# Altium PCB motorServoDriver.PcbDoc
Units mm, origin at the board's own origin, x right, y up, seen from the top; angles counter-clockwise.
Board outline 125.35 x 63.75 mm, 2 copper layers (Top Layer, Bottom Layer); 79 components, 83 nets, 298 pads, 401 vias.
Unrouted connection lines stored in the file: 8.
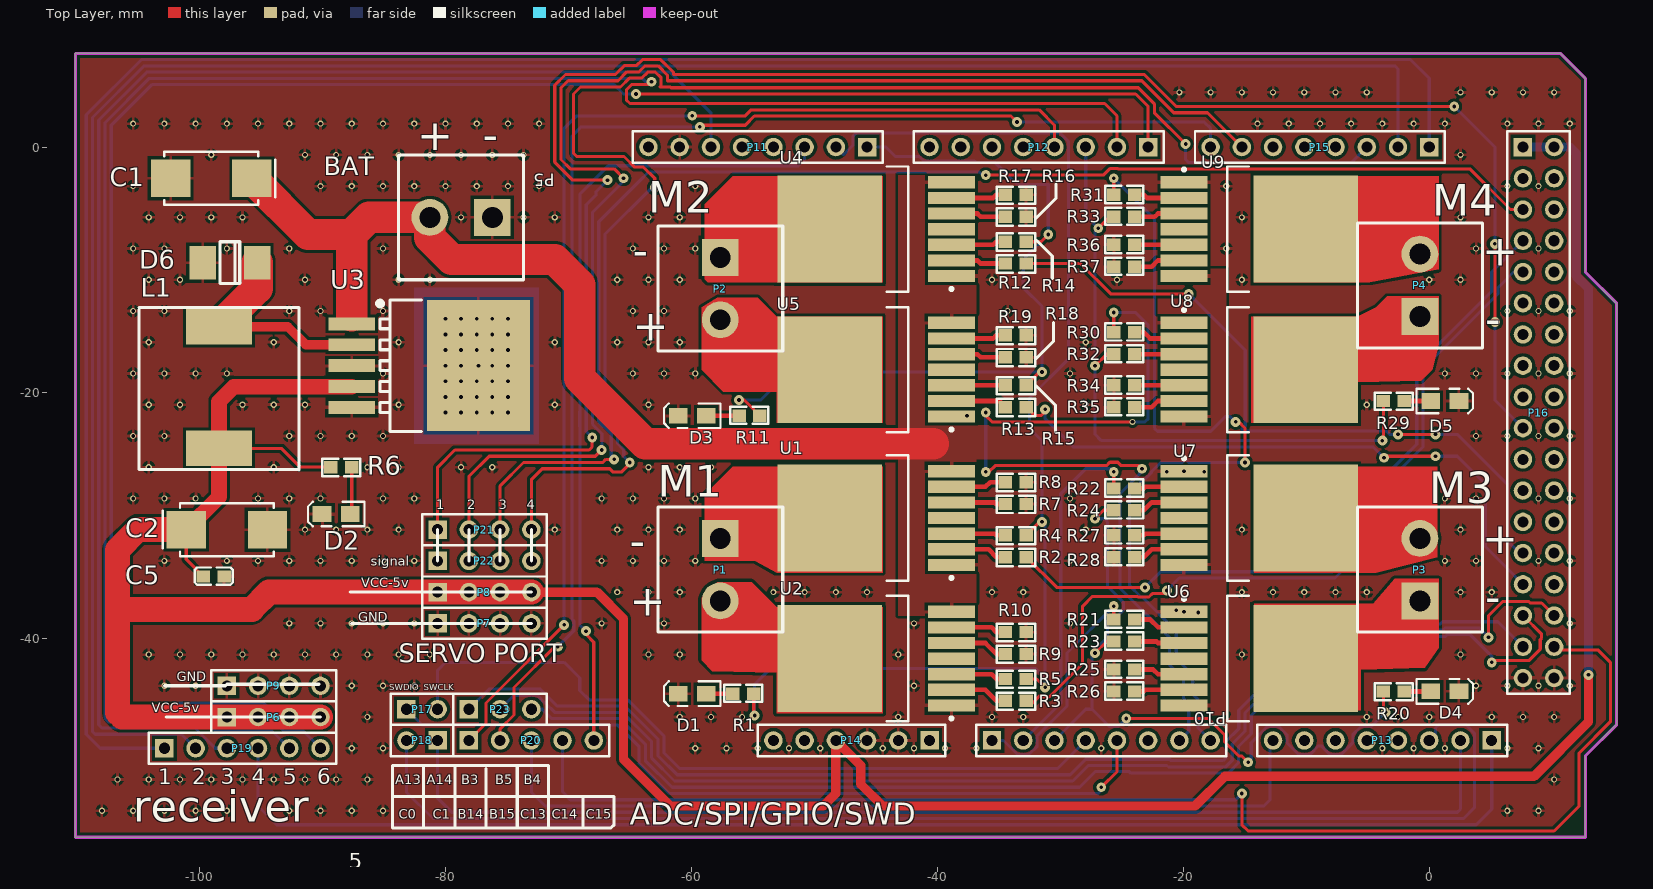
[diagram p0: Top Layer view]
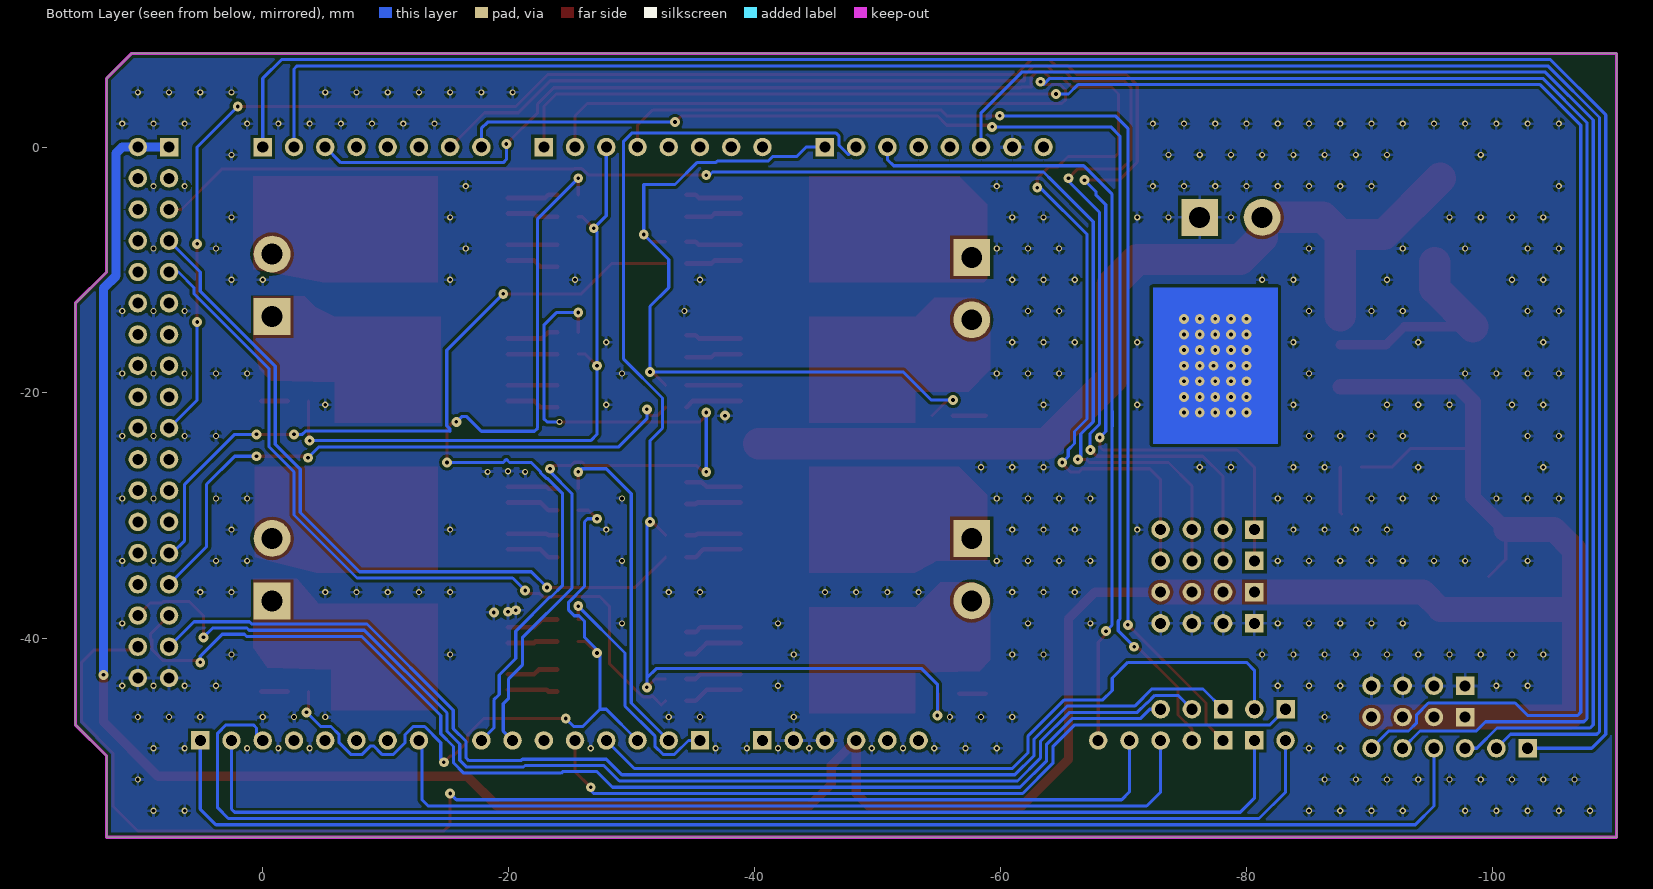
[diagram p1: Bottom Layer view, seen from below]

## Layer stack, top to bottom
Top Solder: solder mask 0.0102, Solder Resist, Dk 3.5
Top Layer: signal copper 0.0356
Dielectric 1: dielectric 0.32, FR-4, Dk 4.8
Bottom Layer: signal copper 0.0356
Bottom Solder: solder mask 0.0102, Solder Resist, Dk 3.5

## Board outline
-110.109,-56.134 -110.109,7.62 10.668,7.62 12.7,5.588 12.7,-10.16 15.24,-12.7 15.24,-46.99 12.7,-49.53 12.7,-56.134

## Design rules (kind name [scope] priority, off if disabled: settings)
Clearance [All] p1: gap=0.254
ComponentClearance [All] p1 off: gap=0.254 collisioncheckmode=3 verticalgap=0.254 showdistances=FALSE
HoleSize [All] p1: absolutevalues=TRUE maxlimit=2.54 minlimit=0.3 maxpercent=80.000 minpercent=20.000
MinimumSolderMaskSliver [All] p1: minsoldermaskwidth=0.001
PolygonConnect [All] p1: connectstyle=Relief reliefconductorwidth=0.254 reliefentries=4 polygonreliefangle="90 Angle" airgapwidth=0.254
RoutingVias [All] p1: holewidth=0.3 width=0.8 viastyle="Through Hole" minholewidth=0.3 minwidth=0.8 maxholewidth=2.54 maxwidth=3
SilkToSilkClearance [All] p1 off: silktosilkclearance=0.254
SilkToSolderMaskClearance [IsPad] p1 off: minsilkscreentomaskgap=0.254 clearancetoexposedcopper=TRUE
SolderMaskExpansion [All] p1: expansion=0.102
Width [All] p1: maxlimit=2.54 minlimit=0.178 preferedwidth=0.254
25 further rules are at their usual default settings.

## Components (designator, comment, footprint, x,y, rotation, side; value= is the part's Value field where it differs from the comment)
C1 "Cap" CAP-7343 -99.06,-2.54 r180 top
C2 "Cap" CAP-7343 -97.79,-31.115 r0 top
C5 "cap smd" CAP-0603 -99.695,-34.925 r0 top
D1 "LED2" D2012[0805] -59.944,-44.45 r180 top
D2 "LED2" D2012[0805] -88.9,-29.845 r180 top
D3 "LED2" D2012[0805] -59.944,-21.844 r180 top
D4 "LED2" D2012[0805] 1.27,-44.272 r0 top
D5 "LED2" D2012[0805] 1.27,-20.65 r0 top
D6 "SS34" LC-SMB(DO-214AA)_S3 -97.536,-9.398 r180 top
L1 "Inductor" Inductor1207 -98.425,-14.605 r270 top
P1 "2_Pins_Port" WJ2EDGV-5.08-2P -57.658,-31.826 r270 top
P2 "2_Pins_Port" WJ2EDGV-5.08-2P -57.658,-8.966 r270 top
P3 "2_Pins_Port" WJ2EDGV-5.08-2P -0.762,-36.906 r90 top
P4 "2_Pins_Port" WJ2EDGV-5.08-2P -0.762,-13.792 r90 top
P5 "2_Pins_Port" WJ2EDGV-5.08-2P -76.2,-5.715 r180 top
P6 "VCC-5" HDR1X4 -97.79,-46.355 r0 top
P7 "GND" HDR1X4 -80.645,-38.735 r0 top
P8 "VCC" HDR1X4 -80.645,-36.195 r0 top
P9 "GND" HDR1X4 -97.79,-43.815 r0 top
P10 "Header 8" HDR1X8 -35.56,-48.26 r0 top
P11 "Header 8" HDR1X8 -45.72,0 r180 top
P12 "Header 8" HDR1X8 -22.86,0 r180 top
P13 "Header 8" HDR1X8 5.08,-48.26 r180 top
P14 "5vGND" HDR1x6 -40.64,-48.26 r180 top
P15 "Header 8" HDR1X8 0,0 r180 top
P16 "Header 18X2" HDR2X18 7.62,0 r270 top
P17 "SWD" HDR1X2 -83.185,-45.72 r0 top
P18 "ADC" HDR1X2 -80.645,-48.26 r180 top
P19 "REC" HDR1X6 -102.87,-48.895 r0 top
P20 "Header 5" HDR1X5 -78.105,-48.26 r0 top
P21 "Sig" HDR1X4 -80.645,-31.115 r0 top
P22 "Sig" HDR1X4 -80.645,-33.655 r0 top
P23 "SPI3" HDR1X3 -78.105,-45.72 r0 top
R1 "Res1" RES-0603 -56.642,-44.45 r0 top
R2 "10K" RES-0603 -32.766,-33.35 r180 top
R3 "10K" RES-0603 -32.766,-45.034 r180 top
R4 "10K" RES-0603 -32.766,-31.572 r180 top
R5 "10K" RES-0603 -32.766,-43.256 r180 top
R6 "RES1" RES-0603 -87.63,-26.035 r180 top
R7 "10K" RES-0603 -32.766,-29.032 r180 top
R8 "10K" RES-0603 -32.766,-27.254 r180 top
R9 "10K" RES-0603 -32.766,-41.224 r180 top
R10 "10K" RES-0603 -32.766,-39.446 r180 top
R11 "Res1" RES-0603 -56.134,-21.844 r0 top
R12 "10K" RES-0603 -32.766,-9.474 r180 top
R13 "10K" RES-0603 -32.766,-21.158 r180 top
R14 "10K" RES-0603 -32.766,-7.696 r180 top
R15 "10K" RES-0603 -32.766,-19.38 r180 top
R16 "10K" RES-0603 -32.766,-5.664 r180 top
R17 "10K" RES-0603 -32.766,-3.886 r180 top
R18 "10K" RES-0603 -32.766,-17.094 r180 top
R19 "10K" RES-0603 -32.766,-15.316 r180 top
R20 "Res1" RES-0603 -2.032,-44.272 r180 top
R21 "10K" RES-0603 -25.654,-38.43 r0 top
R22 "10K" RES-0603 -25.654,-27.762 r0 top
R23 "10K" RES-0603 -25.654,-40.208 r0 top
R24 "10K" RES-0603 -25.654,-29.54 r0 top
R25 "10K" RES-0603 -25.654,-42.494 r0 top
R26 "10K" RES-0603 -25.654,-44.272 r0 top
R27 "10K" RES-0603 -25.654,-31.572 r0 top
R28 "10K" RES-0603 -25.654,-33.35 r0 top
R29 "Res1" RES-0603 -2.032,-20.65 r180 top
R30 "10K" RES-0603 -25.654,-15.062 r0 top
R31 "10K" RES-0603 -25.654,-3.886 r0 top
R32 "10K" RES-0603 -25.654,-16.84 r0 top
R33 "10K" RES-0603 -25.654,-5.664 r0 top
R34 "10K" RES-0603 -25.654,-19.38 r0 top
R35 "10K" RES-0603 -25.654,-21.158 r0 top
R36 "10K" RES-0603 -25.654,-7.95 r0 top
R37 "10K" RES-0603 -25.654,-9.728 r0 top
U1 "BTN7970" BTN7970 -44.958,-30.175 r180 top
U2 "BTN7970" BTN7970 -44.958,-41.605 r180 top
U3 "LM2596" LC-TO-263-5 -87.63,-17.78 r180 top
U4 "BTN7970" BTN7970 -44.958,-6.68 r180 top
U5 "BTN7970" BTN7970 -44.958,-18.11 r180 top
U6 "BTN7970" BTN7970 -13.843,-41.605 r0 top
U7 "BTN7970" BTN7970 -13.843,-30.175 r0 top
U8 "BTN7970" BTN7970 -13.843,-18.11 r0 top
U9 "BTN7970" BTN7970 -13.843,-6.68 r0 top

## Footprints (in the part's own frame and the unit in brackets; to place one, negate y for a bottom-side part, rotate by r counter-clockwise, add the part's x,y. Pads: shape width x height; smd on the part's side, far side on the other; paste and mask are expansions set on the pad)
BTN7970 [mm] "D2-PAK, 8-Pads, Body 7.82x8.46mm (max), IPC Medium Density"
  rect 3.85x1 smd paste-0.1: 1(-6.1,3.81) 2(-6.1,2.54) 3(-6.1,1.27) 4(-6.1,0) 5(-6.1,-1.27) 6(-6.1,-2.54) 7(-6.1,-3.81)
  rect 8.5x8.7 smd paste-1: 4(3.8,0)
  silkscreen extent -6.23,-5.1 -0.85,5.1, body extent -2.6,-5.1 6.85,5.1, height 4.4
CAP-0603 [mm]
  rect 1.1x1 smd: 1(0,0) 2(1.7,0)
  silkscreen extent -0.71,-0.67 2.39,0.73
CAP-7343 [mm] "钽电容"
  rect 3.2x3.05 smd: 1(-3.302,0) 2(3.302,0)
  silkscreen extent -5.21,-2.16 3.81,2.16, body extent -3.68,-1.91 3.68,1.91, height 2.95
D2012[0805] [mil]
  rect 60x50 smd: 1(-45,0) 2(45,0)
  silkscreen extent -91,-39 91,39, body extent -39,-24 39,24, height 47
HDR1X2 [mm] "Connector; Header; 2 Position"
  rect 1.5x1.5 hole 0.9: 1(0,0)
  round 1.5 hole 0.9: 2(2.54,0)
  silkscreen extent -1.27,-1.27 3.81,1.27
HDR1X3 [mm] "Connector; Header; 3 Position"
  rect 1.5x1.5 hole 0.9: 1(0,0)
  round 1.5 hole 0.9: 2(2.54,0) 3(5.08,0)
  silkscreen extent -1.27,-1.27 6.35,1.27
HDR1X4 [mm] "Connector; Header; 4 Position"
  rect 1.5x1.5 hole 0.9: 1(0,0)
  round 1.5 hole 0.9: 2(2.54,0) 3(5.08,0) 4(7.62,0)
  silkscreen extent -1.27,-1.27 8.89,1.27
HDR1X5 [mm] "Connector; Header; 5 Position"
  rect 1.5x1.5 hole 0.9: 1(0,0)
  round 1.5 hole 0.9: 2(2.54,0) 3(5.08,0) 4(7.62,0) 5(10.16,0)
  silkscreen extent -1.27,-1.27 11.43,1.27
HDR1x6 [mm] "Connector; Header; 6 Position"
  rect 1.5x1.5 hole 0.9: 1(0,0)
  round 1.5 hole 0.9: 2(2.54,0) 3(5.08,0) 4(7.62,0) 5(10.16,0) 6(12.7,0)
  silkscreen extent -1.27,-1.27 13.97,1.27
HDR1X6 [mm] "Connector; Header; 6 Position"
  rect 1.5x1.5 hole 0.9: 1(0,0)
  round 1.5 hole 0.9: 2(2.54,0) 3(5.08,0) 4(7.62,0) 5(10.16,0) 6(12.7,0)
  silkscreen extent -1.27,-1.27 13.97,1.27
HDR1X8 [mm] "Connector; Header; 8 Position"
  rect 1.5x1.5 hole 0.9: 1(0,0)
  round 1.5 hole 0.9: 2(2.54,0) 3(5.08,0) 4(7.62,0) 5(10.16,0) 6(12.7,0) 7(15.24,0) 8(17.78,0)
  silkscreen extent -1.27,-1.27 19.05,1.27
HDR2X18 [mm] "Connector; Header; 18x2 Position"
  rect 1.5x1.5 hole 0.9: 1(0,0)
  round 1.5 hole 0.9: 2(0,2.54) 3(2.54,0) 4(2.54,2.54) 5(5.08,0) 6(5.08,2.54) 7(7.62,0) 8(7.62,2.54) 9(10.16,0) 10(10.16,2.54) 11(12.7,0) 12(12.7,2.54) 13(15.24,0) 14(15.24,2.54) 15(17.78,0) 16(17.78,2.54) 17(20.32,0) 18(20.32,2.54) 19(22.86,0) 20(22.86,2.54) 21(25.4,0) 22(25.4,2.54) 23(27.94,0) 24(27.94,2.54) 25(30.48,0) 26(30.48,2.54) 27(33.02,0) 28(33.02,2.54) 29(35.56,0) 30(35.56,2.54) 31(38.1,0) 32(38.1,2.54) 33(40.64,0) 34(40.64,2.54) 35(43.18,0) 36(43.18,2.54)
  silkscreen extent -1.27,-1.27 44.45,3.81
Inductor1207 [mm] "Inductor1207"
  rect 2.9x5.4 smd: 1(0,0) 2(9.9,0)
  silkscreen extent -1.55,-6.5 11.66,6.5
LC-SMB(DO-214AA)_S3 [mm]
  rect 2.159x2.743 smd: 1(2.21,0) 2(-2.21,0)
  silkscreen extent -0.8,-1.7 0.8,1.7
LC-TO-263-5 [mm]
  rect 8.4x10.65 smd: 0(-10.3,0)
  rect 3.8x1.05 smd: 1(0,-3.4) 2(0,-1.7) 3(0,0) 4(0,1.7) 5(0,3.4)
  silkscreen extent -5.65,-5.35 -2.1,5.35
RES-0603 [mm] "1/10W"
  rect 1.1x1 smd: 1(0,0) 2(1.7,0)
  silkscreen extent -0.71,-0.67 2.39,0.73
WJ2EDGV-5.08-2P [mm]
  rect 3x3 hole 1.7: 1(0,0)
  round 3 hole 1.7: 2(5.08,0)
  silkscreen extent -2.54,-5.08 7.62,5.08

## Part data
C1 C2: library part "Cap Pol S", "贴片极性电容"
C5: library part CAP, "贴片无极性电容"
D1 D2 D3 D4 D5: "Typical RED, GREEN, YELLOW, AMBER GaAs LED"
D6: library part "Diode 1N5400", "3 Amp General Purpose Rectifier"
P6 P7 P8 P9 P21 P22: library part "Header 4", "Header, 4-Pin"
P10 P11 P12 P13 P15: "Header, 8-Pin"
P14 P19: library part "Header 6", "Header, 6-Pin"
P16: "Header, 18-Pin, Dual row"
P17 P18: library part "Header 2", "Header, 2-Pin"
P20: "Header, 5-Pin"
P23: library part "Header 3", "Header, 3-Pin"
R1 R11 R20 R29: "Resistor"
R2 R3 R4 R5 R7 R8 R9 R10 R12 R13 R14 R15 R16 R17 R18 R19 R21 R22 R23 R24 R25 R26 R27 R28 R30 R31 R32 R33 R34 R35 R36 R37: library part res1, "Resistor"

## Via types
v1: diameter 0.5, hole 0.3, Top Layer to Bottom Layer, 306 vias
v2: diameter 0.8, hole 0.3, Top Layer to Bottom Layer, 95 vias

## Nets (pads, with @x,y where several pads share a name; then routed paths per layer and width w, separated by ;. In a path a pad name is that pad's centre, name@x,y a point inside that pad or via, vN(x,y) a via of type N, cw(c..) or ccw(c..) an arc to the next point about the centre after c; other vN are vias at no path point)
ADC-OTHER: P13.1 P19.4 | length 111.8
  Bottom Layer w0.254: P19.4 -95.25,-53.594 -93.726,-55.118 3.81,-55.118 5.08,-53.848 P13.1
ADC_CH10: P13.3 P18.2 | length 103.1
  Bottom Layer w0.254: P18.2 -83.185,-52.451 -81.026,-54.61 2.794,-54.61 3.671,-53.733 3.671,-47.677 2.984,-46.99 0.762,-46.99 0.508,-47.244 0.508,-47.752 P13.3
ADC_CH11: P13.2 P18.1 | length 94.1
  Bottom Layer w0.254: P18.1 -80.645,-52.959 -79.502,-54.102 2.286,-54.102 2.54,-53.848 P13.2
AXIS-A-EN: P16.5 P21.3 P22.3 | length 114.6
  Top Layer w0.254: P22.3 P21.3 -75.565,-27.559 -73.66,-25.654 -67.221,-25.654 -66.967,-25.4 v2(-66.294,-25.4) ; v2(-36.068,-2.286) -26.505,-2.286 -25.977,-1.759 -25.331,-1.759 -25.311,-1.778 3.302,-1.778 6.604,-5.08 P16.5
  Bottom Layer w0.254: v2(-66.294,-25.4) -66.529,-25.165 -66.529,-23.342 -67.545,-22.326 -67.545,-6.077 -64.262,-2.794 -63.5,-2.032 -36.576,-2.032 -36.322,-2.286 v2(-36.068,-2.286)
AXIS-A-FR: P16.9 R3.1 | length 64
  Top Layer w0.254: R3.1 -32.423,-45.377 -31.667,-44.621 -31.565,-44.723 -30.919,-44.723 -28.194,-41.999 -28.194,-37.338 -27.413,-36.557 -23.711,-36.557 -23.672,-36.595 -22.791,-36.595 -22.517,-36.322 -21.59,-36.322 v2(-21.336,-36.068)
  Bottom Layer w0.254: v2(-21.336,-36.068) -20.32,-35.052 -7.664,-35.052 -2.54,-29.928 -2.54,-26.416 -0.508,-24.384 -0.508,-18.034 5.588,-11.938 5.588,-11.43 6.858,-10.16 P16.9
AXIS-A-STEP: P16.7 R2.1 | length 59.8
  Top Layer w0.254: R2.1 -30.302,-35.814 v2(-23.114,-35.814)
  Bottom Layer w0.254: v2(-23.114,-35.814) -21.844,-34.544 -7.874,-34.544 -3.048,-29.718 -3.048,-26.206 -1.016,-24.174 -1.016,-17.824 5.08,-11.728 5.08,-10.16 P16.7
AXIS-X-EN: P16.19 P21.1 P22.1 | length 159
  Top Layer w0.254: P22.1 P21.1 -80.645,-26.035 -79.248,-24.638 -68.326,-24.638 -68.091,-24.403 -68.091,-23.641 v2(-68.072,-23.622) ; v2@-66.929,-2.794 v2(-66.827,-2.692) -69.655,-2.692 -71.12,-1.226 -71.12,5.036 -70.253,5.904 -66.19,5.904 -65.471,6.623 -64.479,6.623 -63.99,7.112 -62.502,7.112 -61.449,6.059 -61.449,5.904 -23.176,5.904 -20.574,3.302 v2(2.032,3.302) ; v2(5.334,-14.224) v2(5.334,-7.874)
  Bottom Layer w0.254: v2(-68.072,-23.622) -68.561,-23.133 -68.561,-4.684 -67.753,-3.875 -67.753,-3.617 v2(-66.827,-2.692) ; v2(2.032,3.302) 5.334,0 v2(5.334,-7.874) ; v2(5.334,-14.224) 5.334,-20.574 P16.19
AXIS-X-FR: P10.2 R22.1 | length 27.9
  Top Layer w0.254: R22.1 v2(-25.654,-26.416)
  Bottom Layer w0.254: P10.2 -29.972,-45.212 -29.972,-28.194 -27.94,-26.162 -25.908,-26.162 v2(-25.654,-26.416)
AXIS-X-STEP: P10.1 R21.1 | length 19.7
  Top Layer w0.254: R21.1 -25.832,-38.43 -25.654,-38.252 v2(-25.654,-37.338)
  Bottom Layer w0.254: P10.1 -34.619,-48.26 -33.488,-49.391 -32.552,-49.391 -31.889,-48.728 -31.889,-47.891 -29.464,-45.466 -29.464,-41.148 v2(-25.654,-37.338)
AXIS-Y-EN: P10.3 R20.2 R23.1 R24.1 | length 60.2
  Top Layer w0.254: v2(-27.178,-41.148) -26.238,-40.208 R23.1 ; v2(-27.178,-30.226) -26.492,-29.54 R24.1 ; v2(-24.638,-46.482) -17.959,-46.482 -16.649,-47.792 -16.649,-48.375 -15.494,-49.53 -15.24,-49.53 v2(-14.732,-50.038) ; R20.2 -3.732,-45.896 -3.81,-45.974 v2(-3.556,-45.974)
  Bottom Layer w0.254: P10.3 -27.94,-45.72 -27.432,-45.72 ; v2(-27.178,-30.226) -26.416,-30.226 -26.162,-30.48 -26.162,-35.725 -24.873,-37.015 -24.873,-37.661 -25.331,-38.119 -25.717,-38.119 -26.162,-38.564 -26.162,-39.878 -27.178,-40.894 v2(-27.178,-41.148) -27.432,-41.402 -27.432,-45.72 ; v2(-24.638,-46.482) -25.285,-47.129 -26.023,-47.129 -27.432,-45.72 ; v2(-14.732,-50.038) -14.478,-49.784 -14.478,-48.439 -13.168,-47.129 -12.232,-47.129 -11.569,-47.792 -11.569,-48.45 -10.628,-49.391 -9.692,-49.391 -9.005,-48.705 -8.775,-48.705 -8.088,-49.391 -7.152,-49.391 -6.211,-48.45 -6.211,-47.792 -5.548,-47.129 -4.711,-47.129 v2(-3.556,-45.974)
AXIS-Y-FR: P10.8 R31.1 | length 68.5
  Top Layer w0.254: R31.1 v2(-25.654,-2.54) ; v2(-15.748,-22.352) -16.002,-22.352 -15.748,-22.606 -15.494,-22.352 -14.986,-22.86 v2(-14.986,-25.654)
  Bottom Layer w0.254: v2(-25.654,-2.54) -22.352,-5.842 -22.352,-22.86 -22.098,-23.114 -17.78,-23.114 -16.586,-21.92 -16.18,-21.92 v2(-15.748,-22.352) ; P10.8 -18.796,-47.244 -18.796,-44.958 -19.237,-44.517 -19.237,-42.932 -20.574,-41.594 -20.574,-39.37 -23.349,-36.595 -23.437,-36.595 -24.384,-35.649 -24.384,-28.194 -23.133,-26.943 -23.045,-26.943 -22.587,-26.485 -22.587,-26.397 -21.844,-25.654 -20.066,-25.654 -19.812,-25.4 -19.558,-25.654 v2(-14.986,-25.654)
AXIS-Y-STEP: P10.7 R30.1 | length 69.7
  Top Layer w0.254: v2(-36.068,-26.416) -35.814,-26.416 -35.306,-25.908 -26.251,-25.908 -25.977,-25.635 -25.331,-25.635 -25.057,-25.908 -23.622,-25.908 v2(-23.368,-26.162) ; v2(-36.068,-21.59) -36.068,-21.844 -35.56,-22.352 v1(-24.13,-22.352) ; R30.1 v2(-25.654,-13.462)
  Bottom Layer w0.254: v2(-36.068,-26.416) v2(-36.068,-21.59) ; v2(-25.654,-13.462) -23.876,-13.462 -22.86,-14.478 -22.86,-22.098 -23.114,-22.352 v1(-24.13,-22.352) ; v2(-23.368,-26.162) -23.368,-26.416 -25.146,-28.194 -25.146,-35.876 -21.113,-39.909 -21.113,-42.133 -19.999,-43.247 -19.999,-44.833 -19.558,-45.274 -19.558,-47.498 P10.7
AXIS-Z-EN: P13.8 P20.3 | length 69.9
  Bottom Layer w0.254: P20.3 -73.025,-52.451 -71.882,-53.594 -13.462,-53.594 -12.954,-53.086 -12.954,-48.514 P13.8
AXIS-Z-FR: P16.29 R13.1 | length 50.4
  Top Layer w0.254: R13.1 -32.08,-21.844 -31.572,-21.844 -31.242,-21.514 v2(-31.242,-21.336) ; v2(-3.683,-25.273) -3.556,-25.146 v2(0.508,-25.146)
  Bottom Layer w0.254: v2(-31.242,-21.336) -31.242,-22.098 -28.956,-24.384 -4.572,-24.384 v2(-3.683,-25.273) ; v2(0.508,-25.146) 2.286,-25.146 4.572,-27.432 4.572,-32.512 P16.29
AXIS-Z-STEP: P16.27 R12.1 | length 57.1
  Top Layer w0.254: R12.1 -28.372,-9.474 -25.908,-11.938 v2(-19.558,-11.938) ; v2(-2.54,-23.368) v2(0.508,-23.368)
  Bottom Layer w0.254: v2(-19.558,-11.938) -14.967,-16.529 -14.967,-22.675 -15.24,-22.949 -15.24,-23.114 -15.221,-23.095 -3.487,-23.095 -3.213,-23.368 v2(-2.54,-23.368) ; v2(0.508,-23.368) 2.286,-23.368 6.35,-27.432 6.35,-32.004 7.366,-33.02 P16.27
EX-FAN-5: P11.3 P20.5 | length 65.4
  Top Layer w0.254: v2(-68.58,-39.37) -68.58,-39.624 -67.945,-40.259 P20.5
  Bottom Layer w0.254: v2(-68.58,-39.37) -69.069,-38.881 -69.069,-22.754 -69.088,-22.735 -69.088,-22.165 -69.088,-21.534 -69.088,-21.472 -69.069,-21.453 -69.069,-3.81 -69.05,-3.81 -66.764,-1.524 -51.308,-1.524 -50.8,-1.016 P11.3
EX-PWM-5: P11.2 R1.2 R4.1 R5.1 | length 99.2
  Top Layer w0.254: R1.2 -54.942,-46.15 v2(-54.864,-46.228) ; R5.1 -31.928,-43.256 v2(-31.242,-43.942) ; R4.1 -31.674,-30.48 v2(-31.496,-30.48)
  Bottom Layer w0.254: v2(-54.864,-46.228) -54.864,-43.688 -53.594,-42.418 -32.004,-42.418 -31.242,-43.18 ; P11.2 -47.64,-0.62 -46.851,0.169 -46.851,0.908 -46.628,1.131 -30.012,1.131 -29.349,0.468 -29.349,-17.246 -32.512,-20.409 -32.512,-22.86 -31.496,-23.876 v2(-31.496,-30.48) -31.242,-30.734 -31.242,-43.18 ; v2(-31.242,-43.942) -31.242,-43.18
GND: C1.2 C2.2 C5.2 D1.2 D2.2 D3.2 D4.2 D5.2 D6.1 P5.1 P7.1 P7.2 P7.3 P7.4 P9.1 P9.2 P9.3 P9.4 P11.7 P14.2 P14.3 P16.35 P16.36 R7.1 R8.1 R9.1 R10.1 R16.1 R17.1 R18.1 R19.1 R25.1 R26.1 R27.1 R28.1 R34.1 R35.1 R36.1 R37.1 U1.1 U2.1 U3.0 U3.3 U3.5 U4.1 U5.1 U6.1 U7.1 U8.1 U9.1
  other v1: -107.95,-53.975 -105.41,-53.975 -102.87,-53.975 -100.33,-53.975 -97.79,-53.975 -92.71,-53.975 -90.17,-53.975 -87.63,-53.975 -85.09,-53.975 6.35,-53.975 8.89,-53.975 -106.68,-51.435 -104.14,-51.435 -101.6,-51.435 -99.06,-51.435 -96.52,-51.435 -93.98,-51.435 -91.44,-51.435 -88.9,-51.435 -86.36,-51.435 10.16,-51.435 -87.63,-48.895 -85.09,-48.895 -59.69,-48.895 -57.15,-48.895 -54.61,-48.895 -52.07,-48.895 -49.53,-48.895 -44.45,-48.895 -41.91,-48.895 -39.37,-48.895 -36.83,-48.895 -26.67,-48.895 -3.81,-48.895 -1.27,-48.895 1.27,-48.895 6.35,-48.895 8.89,-48.895 -86.36,-46.355 -60.96,-46.355 -58.42,-46.355 -55.88,-46.355 -43.18,-46.355 -35.56,-46.355 -33.02,-46.355 -5.08,-46.355 -2.54,-46.355 0,-46.355 5.08,-46.355 7.62,-46.355 10.16,-46.355 -102.87,-43.815 -100.33,-43.815 -87.63,-43.815 -85.09,-43.815 -82.55,-43.815 -41.91,-43.815 3.81,-43.815 6.35,-43.815 8.89,-43.815 11.43,-43.815 -104.14,-41.275 -101.6,-41.275 -99.06,-41.275 -96.52,-41.275 -93.98,-41.275 -91.44,-41.275 -88.9,-41.275 -86.36,-41.275 -83.82,-41.275 -81.28,-41.275 -63.5,-41.275 -60.96,-41.275 -43.18,-41.275 -15.24,-41.275 2.54,-41.275 -92.71,-38.735 -90.17,-38.735 -87.63,-38.735 -85.09,-38.735 -82.55,-38.735 -67.31,-38.735 -62.23,-38.735 -41.91,-38.735 -29.21,-38.735 11.43,-38.735 -66.04,-36.195 -63.5,-36.195 -60.96,-36.195 -53.34,-36.195 -50.8,-36.195 -48.26,-36.195 -45.72,-36.195 -35.56,-36.195 -33.02,-36.195 -15.24,-36.195 -12.7,-36.195 -10.16,-36.195 -7.62,-36.195 -5.08,-36.195 2.54,-36.195 5.08,-36.195 -102.87,-33.655 -97.79,-33.655 -95.25,-33.655 -92.71,-33.655 -90.17,-33.655 -87.63,-33.655 -85.09,-33.655 -82.55,-33.655 -67.31,-33.655 -64.77,-33.655 -62.23,-33.655 -59.69,-33.655 -29.21,-33.655 1.27,-33.655 3.81,-33.655 8.89,-33.655 11.43,-33.655 -91.44,-31.115 -88.9,-31.115 -86.36,-31.115 -83.82,-31.115 -71.12,-31.115 -66.04,-31.115 -63.5,-31.115 -60.96,-31.115 -27.94,-31.115 -15.24,-31.115 2.54,-31.115 -105.41,-28.575 -102.87,-28.575 -100.33,-28.575 -95.25,-28.575 -92.71,-28.575 -90.17,-28.575 -85.09,-28.575 -82.55,-28.575 -67.31,-28.575 -64.77,-28.575 -62.23,-28.575 -59.69,-28.575 -29.21,-28.575 1.27,-28.575 3.81,-28.575 8.89,-28.575 11.43,-28.575 -21.336,-26.416 -18.288,-26.416 -19.943,-26.365 -104.14,-26.035 -93.98,-26.035 -86.36,-26.035 -83.82,-26.035 -78.74,-26.035 -76.2,-26.035 -63.5,-26.035 -60.96,-26.035 -58.42,-26.035 -105.41,-23.495 -102.87,-23.495 -92.71,-23.495 -90.17,-23.495 -87.63,-23.495 -85.09,-23.495 3.81,-23.495 6.35,-23.495 8.89,-23.495 11.43,-23.495 -104.14,-20.955 -101.6,-20.955 -96.52,-20.955 -93.98,-20.955 -91.44,-20.955 -83.82,-20.955 -71.12,-20.955 -63.5,-20.955 -27.94,-20.955 -5.08,-20.955 -105.41,-18.415 -102.87,-18.415 -100.33,-18.415 -97.79,-18.415 -85.09,-18.415 -64.77,-18.415 -62.23,-18.415 -59.69,-18.415 -29.21,-18.415 1.27,-18.415 3.81,-18.415 6.35,-18.415 8.89,-18.415 11.43,-18.415 -104.14,-15.875 -93.98,-15.875 -83.82,-15.875 -71.12,-15.875 -66.04,-15.875 -63.5,-15.875 -60.96,-15.875 -27.94,-15.875 -105.41,-13.335 -102.87,-13.335 -92.71,-13.335 -90.17,-13.335 -85.09,-13.335 -64.77,-13.335 -62.23,-13.335 -34.29,-13.335 6.35,-13.335 8.89,-13.335 11.43,-13.335 -104.14,-10.795 -101.6,-10.795 -91.44,-10.795 -83.82,-10.795 -81.28,-10.795 -66.04,-10.795 -63.5,-10.795 -60.96,-10.795 -35.56,-10.795 -25.4,-10.795 -15.24,-10.795 0,-10.795 2.54,-10.795 -105.41,-8.255 -102.87,-8.255 -97.79,-8.255 -92.71,-8.255 -85.09,-8.255 -64.77,-8.255 -62.23,-8.255 -59.69,-8.255 -16.51,-8.255 3.81,-8.255 8.89,-8.255 -104.14,-5.715 -101.6,-5.715 -99.06,-5.715 -96.52,-5.715 -78.74,-5.715 -73.66,-5.715 -71.12,-5.715 -63.5,-5.715 -60.96,-5.715 -15.24,-5.715 2.54,-5.715 -105.41,-3.175 -90.17,-3.175 -87.63,-3.175 -85.09,-3.175 -82.55,-3.175 -80.01,-3.175 -77.47,-3.175 -74.93,-3.175 -72.39,-3.175 -59.69,-3.175 -16.51,-3.175 6.35,-3.175 8.89,-3.175 -99.06,-0.635 -91.44,-0.635 -88.9,-0.635 -86.36,-0.635 -83.82,-0.635 -81.28,-0.635 -78.74,-0.635 -76.2,-0.635 -73.66,-0.635 2.54,-0.635 -105.41,1.905 -102.87,1.905 -100.33,1.905 -97.79,1.905 -95.25,1.905 -92.71,1.905 -90.17,1.905 -87.63,1.905 -85.09,1.905 -82.55,1.905 -80.01,1.905 -77.47,1.905 -74.93,1.905 -72.39,1.905 -13.97,1.905 -11.43,1.905 -8.89,1.905 -6.35,1.905 -3.81,1.905 -1.27,1.905 1.27,1.905 6.35,1.905 8.89,1.905 11.43,1.905 -20.32,4.445 -17.78,4.445 -15.24,4.445 -12.7,4.445 -10.16,4.445 -7.62,4.445 -5.08,4.445 2.54,4.445 5.08,4.445 7.62,4.445 10.16,4.445
  other v2: -18.796,-37.846 -19.943,-37.795 -20.586,-37.668 -37.592,-21.844 -80.01,-21.59 -78.74,-21.59 -77.47,-21.59 -76.2,-21.59 -74.93,-21.59 -80.01,-20.32 -78.74,-20.32 -77.47,-20.32 -76.2,-20.32 -74.93,-20.32 -80.01,-19.05 -78.74,-19.05 -77.47,-19.05 -76.2,-19.05 -74.93,-19.05 -80.01,-17.78 -78.74,-17.78 -77.33,-17.78 -76.2,-17.78 -74.93,-17.78 -80.01,-16.51 -78.74,-16.51 -77.47,-16.51 -76.2,-16.51 -74.93,-16.51 -80.01,-15.24 -78.74,-15.24 -77.47,-15.24 -76.2,-15.24 -74.93,-15.24 -80.01,-13.97 -78.74,-13.97 -77.47,-13.97 -76.2,-13.97 -74.93,-13.97
HB-PWM-5: P11.1 R11.2 R14.1 R15.1 | length 64.3
  Top Layer w0.254: v2(-56.134,-20.574) -55.704,-20.574 R11.2 ; R15.1 -31.674,-18.288 v2(-31.496,-18.288) ; R14.1 -31.572,-7.696 v2(-30.988,-7.112)
  Bottom Layer w0.254: v2(-56.134,-20.574) -54.356,-20.574 -52.07,-18.288 v2(-31.496,-18.288) -31.496,-12.954 -33.02,-11.43 -33.02,-9.144 v2(-30.988,-7.112) -30.988,-3.048 -33.528,-3.048 -35.306,-1.27 -36.83,-1.27 -36.969,-1.131 -41.108,-1.131 -41.477,-0.762 -43.434,-0.762 -44.196,0 P11.1
I2C1_SCL: P15.1 P19.1 | length 174.5
  Bottom Layer w0.254: P19.1 -108.077,-48.895 -109.22,-47.752 -109.22,2.62 -104.728,7.112 -1.524,7.112 0,5.588 P15.1
I2C1_SDA: P15.2 P19.2 | length 173.3
  Bottom Layer w0.254: P19.2 -101.473,-47.752 -108.502,-47.752 -108.712,-47.542 -108.712,2.409 -104.517,6.604 -2.794,6.604 -2.54,6.35 P15.2
LED: P11.6 P19.3 | length 116
  Bottom Layer w0.254: P19.3 -98.731,-48.895 -100.382,-47.244 -107.95,-47.244 -108.204,-46.99 -108.204,2.199 -104.307,6.096 -61.722,6.096 -58.42,2.794 P11.6
MOTOR1+: P1.2 U2.4
MOTOR1-: P1.1 U1.4
MOTOR2+: P2.2 U5.4
MOTOR2-: P2.1 U4.4
MOTOR3+: P3.2 U7.4
MOTOR3-: P3.1 U6.4
MOTOR4+: P4.2 U9.4
MOTOR4-: P4.1 U8.4
MOTOR4_EN: P12.3 R29.2 R32.1 R33.1 | length 54.3
  Top Layer w0.254: v2(-27.178,-17.78) -26.238,-16.84 R32.1 ; v2(-26.924,-6.604) -25.984,-5.664 R33.1 ; v2(-3.81,-23.876) -3.732,-23.798 R29.2
  Bottom Layer w0.254: P12.3 -27.94,-5.588 v2(-26.924,-6.604) -27.178,-6.858 v2(-27.178,-17.78) -27.178,-23.368 -26.67,-23.876 v2(-3.81,-23.876)
NetD1_1: D1.1 R1.1 | length 2.2
  Top Layer w0.381: D1.1 R1.1
NetD2_1: D2.1 R6.1 | length 3.9
  Top Layer w0.254: D2.1 -87.63,-29.718 R6.1
NetD3_1: D3.1 R11.1 | length 2.7
  Top Layer w0.381: D3.1 R11.1
NetD4_1: D4.1 R20.1 | length 2.2
  Top Layer w0.381: R20.1 D4.1
NetD5_1: D5.1 R29.1 | length 2.2
  Top Layer w0.381: R29.1 D5.1
NetD6_2: D6.2 L1.1 U3.2 | length 17.9
  Top Layer w0.762: L1.1 -92.837,-14.605 -91.362,-16.08 U3.2
  Top Layer w2.54: L1.1 -95.326,-11.506 D6.2
NetR2_2: R2.2 U1.2 | length 4.7
  Top Layer w0.381: U1.2 -35.841,-32.715 -35.206,-33.35 R2.2
NetR3_2: R3.2 U2.2 | length 4.8
  Top Layer w0.381: U2.2 -36.095,-44.145 -35.206,-45.034 R3.2
NetR4_2: R4.2 U1.3 | length 4.4
  Top Layer w0.381: U1.3 -35.333,-31.445 -35.206,-31.572 R4.2
NetR5_2: R5.2 U2.3 | length 4.5
  Top Layer w0.381: U2.3 -35.587,-42.875 -35.206,-43.256 R5.2
NetR7_2: R7.2 U1.5 | length 4.4
  Top Layer w0.381: U1.5 -35.333,-28.905 -35.206,-29.032 R7.2
NetR8_2: R8.2 U1.6 | length 4.5
  Top Layer w0.381: U1.6 -36.093,-27.635 -35.712,-27.254 R8.2
NetR9_2: R9.2 U2.5 | length 4.8
  Top Layer w0.381: U2.5 -36.095,-40.335 -35.206,-41.224 R9.2
NetR10_2: R10.2 U2.6 | length 4.5
  Top Layer w0.381: U2.6 -35.587,-39.065 -35.206,-39.446 R10.2
NetR12_2: R12.2 U4.2 | length 4.5
  Top Layer w0.381: U4.2 -36.742,-9.22 -36.488,-9.474 R12.2
NetR13_2: R13.2 U5.2 | length 4.6
  Top Layer w0.381: U5.2 -34.974,-20.65 R13.2
NetR14_2: R14.2 U4.3 | length 4.5
  Top Layer w0.381: U4.3 -35.46,-7.95 -35.206,-7.696 R14.2
NetR15_2: R15.2 U5.3 | length 4.4
  Top Layer w0.381: U5.3 R15.2
NetR16_2: R16.2 U4.5 | length 4.5
  Top Layer w0.381: U4.5 -36.742,-5.41 -36.488,-5.664 R16.2
NetR17_2: R17.2 U4.6 | length 4.5
  Top Layer w0.381: U4.6 -35.46,-4.14 -35.206,-3.886 R17.2
NetR18_2: R18.2 U5.5 | length 4.5
  Top Layer w0.381: U5.5 -36.742,-16.84 -36.488,-17.094 R18.2
NetR19_2: R19.2 U5.6 | length 4.5
  Top Layer w0.381: U5.6 -35.46,-15.57 -35.206,-15.316 R19.2
NetR21_2: R21.2 U6.2 | length 4.3
  Top Layer w0.381: R21.2 -22.694,-38.43 -22.059,-39.065 U6.2
NetR22_2: R22.2 U7.2 | length 4.1
  Top Layer w0.381: R22.2 -23.214,-27.762 -23.087,-27.635 U7.2
NetR23_2: R23.2 U6.3 | length 4.1
  Top Layer w0.381: R23.2 -22.186,-40.208 -22.059,-40.335 U6.3
NetR24_2: R24.2 U7.3 | length 4.3
  Top Layer w0.381: R24.2 -23.214,-29.54 -22.579,-28.905 U7.3
NetR25_2: R25.2 U6.5 | length 4.2
  Top Layer w0.381: R25.2 -22.44,-42.494 -22.059,-42.875 U6.5
NetR26_2: R26.2 U6.6 | length 4.1
  Top Layer w0.381: R26.2 -23.214,-44.272 -23.087,-44.145 U6.6
NetR27_2: R27.2 U7.5 | length 4.1
  Top Layer w0.381: R27.2 -23.214,-31.572 -23.087,-31.445 U7.5
NetR28_2: R28.2 U7.6 | length 4.3
  Top Layer w0.381: R28.2 -23.214,-33.35 -22.579,-32.715 U7.6
NetR30_2: R30.2 U8.2 | length 4.2
  Top Layer w0.381: R30.2 -23.214,-15.062 -22.706,-15.57 U8.2
NetR31_2: R31.2 U9.2 | length 4.1
  Top Layer w0.381: R31.2 -23.214,-3.886 -22.96,-4.14 U9.2
NetR32_2: R32.2 U8.3 | length 4
  Top Layer w0.381: R32.2 U8.3
NetR33_2: R33.2 U9.3 | length 4.1
  Top Layer w0.381: R33.2 -22.313,-5.664 -22.059,-5.41 U9.3
NetR34_2: R34.2 U8.5 | length 4
  Top Layer w0.381: R34.2 U8.5
NetR35_2: R35.2 U8.6 | length 4.2
  Top Layer w0.381: R35.2 -22.567,-21.158 -22.059,-20.65 U8.6
NetR36_2: R36.2 U9.5 | length 4
  Top Layer w0.381: R36.2 U9.5
NetR37_2: R37.2 U9.6 | length 4.2
  Top Layer w0.381: R37.2 -22.567,-9.728 -22.059,-9.22 U9.6
PA7: P15.7 P21.2 P22.2 | length 112.7
  Top Layer w0.254: P22.2 P21.2 -78.105,-26.797 -76.454,-25.146 -67.818,-25.146 v2(-67.31,-24.638) ; v2(-65.532,-2.54) -66.294,-1.778 -69.85,-1.778 -70.612,-1.016 -70.612,4.826 -70.042,5.396 -65.98,5.396 -65.26,6.115 -64.269,6.115 -63.78,6.604 -62.712,6.604 -61.957,5.849 -61.957,5.396 -23.386,5.396 -20.784,2.794 -18.034,2.794 P15.7
  Bottom Layer w0.254: v2(-67.31,-24.638) -67.291,-24.619 -67.291,-23.299 -68.053,-22.537 -68.053,-5.315 -65.532,-2.794 v2(-65.532,-2.54)
PA9: P12.2 P19.5 | length 156.8
  Top Layer w0.254: v2(-63.246,5.315) -63.462,5.099 -64.839,5.099 -65.297,4.641 -65.297,3.829 -65.005,3.537 -26.397,3.537 -25.4,2.54 P12.2
  Bottom Layer w0.254: P19.5 -94.119,-47.486 -98.698,-47.486 -99.448,-46.736 -107.442,-46.736 -107.696,-46.482 -107.696,1.988 -104.096,5.588 -64.008,5.588 -63.5,5.08 -63.265,5.315 v2(-63.246,5.315)
PA10: P12.1 P19.6 | length 156.9
  Top Layer w0.254: v2(-64.516,4.318) -23.876,4.318 -22.86,3.302 P12.1
  Bottom Layer w0.254: P19.6 -91.579,-47.486 -93.178,-47.486 -93.841,-46.823 -93.841,-46.165 -94.794,-45.212 -101.854,-45.212 -102.87,-46.228 -106.934,-46.228 -107.188,-45.974 -107.188,1.778 -103.886,5.08 -66.294,5.08 -65.532,4.318 v2(-64.516,4.318)
PA13: P10.5 P17.1 | length 64.8
  Top Layer w0.254: v2(-26.67,-52.07) -25.4,-50.8 P10.5
  Bottom Layer w0.254: P17.1 -81.915,-46.99 -66.04,-46.99 -64.262,-48.768 -64.262,-50.118 -61.802,-52.578 -26.924,-52.578 -26.67,-52.324 v2(-26.67,-52.07)
PA14: P10.4 P17.2 | length 62.1
  Bottom Layer w0.254: P17.2 -80.645,-42.545 -80.01,-41.91 -70.358,-41.91 -69.088,-43.18 -69.088,-44.196 -68.326,-44.958 -65.198,-44.958 -62.23,-47.926 -62.23,-49.276 -60.96,-50.546 -30.226,-50.546 P10.4
PB1: P15.3 P21.4 P22.4 | length 124.1
  Top Layer w0.254: P22.4 P21.4 -73.025,-27.051 -72.136,-26.162 -66.637,-26.162 -66.363,-26.435 -65.717,-26.435 -65.024,-25.743 v2(-65.024,-25.654) ; v2(-62.992,-3.302) -62.992,-2.54 -63.903,-1.629 -64.621,-1.629 -65.487,-0.762 -69.342,-0.762 -69.596,-0.508 -69.596,4.318 -69.026,4.888 -65.769,4.888 -65.05,5.607 -64.027,5.607 -64.027,5.639 -63.569,6.096 -62.923,6.096 -62.465,5.639 -62.465,4.992 -62.569,4.888 -61.714,4.888 -61.652,4.826 -23.666,4.826 -22.352,3.512 -22.352,2.794 v2(-19.812,0.254)
  Bottom Layer w0.254: v2(-65.024,-25.654) -65.513,-25.165 -65.513,-24.619 -66.021,-24.111 -66.021,-23.132 -67.037,-22.116 -67.037,-7.093 -63.246,-3.302 v2(-62.992,-3.302) ; v2(-19.812,0.254) -19.812,-1.016 -19.558,-1.27 -6.35,-1.27 P15.3
PB3: P16.33 P23.1 | length 97.8
  Bottom Layer w0.254: P23.1 -76.466,-44.081 -72.295,-44.081 -70.91,-45.466 -65.409,-45.466 -62.738,-48.137 -62.738,-49.486 -61.17,-51.054 -29.21,-51.054 -27.94,-49.784 -21.114,-49.784 -20.999,-49.899 -16.764,-49.899 -16.529,-49.664 -16.529,-48.334 -15.494,-47.299 -15.494,-45.807 -8.474,-38.787 0.896,-38.787 1.075,-38.608 5.588,-38.608 P16.33
PB4: P16.31 P23.3 | length 97.5
  Top Layer w0.254: v2(5.08,-41.91) 5.219,-41.771 8.088,-41.771 9.029,-40.83 9.029,-40.057 9.144,-39.942 9.144,-39.624 P16.31
  Bottom Layer w0.254: P23.3 -72.136,-45.72 -71.374,-46.482 -65.83,-46.482 -63.754,-48.558 -63.754,-49.907 -61.591,-52.07 -28.448,-52.07 -27.178,-50.8 -24.384,-50.8 -24.269,-50.915 -16.343,-50.915 -15.513,-50.085 -15.513,-48.755 -14.478,-47.72 -14.478,-46.228 -8.053,-39.803 1.317,-39.803 1.496,-39.624 3.302,-39.624 5.08,-41.402 v2(5.08,-41.91)
PB5: P16.32 P23.2 | length 99.8
  Top Layer w0.254: v2(4.826,-39.878) 4.826,-38.1 5.957,-36.969 8.088,-36.969 8.203,-37.084 9.144,-37.084 P16.32
  Bottom Layer w0.254: P23.2 -74.434,-44.589 -72.557,-44.589 -71.934,-45.212 -71.882,-45.212 -71.12,-45.974 -65.619,-45.974 -63.246,-48.347 -63.246,-49.697 -61.381,-51.562 -29,-51.562 -27.73,-50.292 -21.324,-50.292 -21.209,-50.407 -16.554,-50.407 -16.021,-49.874 -16.021,-48.545 -14.986,-47.51 -14.986,-46.018 -8.264,-39.295 1.106,-39.295 1.285,-39.116 4.064,-39.116 v2(4.826,-39.878)
PB14: P12.4 P20.1 | length 95.8
  Top Layer w0.254: P20.1 -76.708,-46.863 -76.708,-45.212 v2(-70.358,-38.862) ; v2(-59.944,2.54) -55.626,2.54 -55.137,3.029 -31.731,3.029 -30.48,1.778 P12.4
  Bottom Layer w0.254: v2(-70.358,-38.862) -70.358,1.524 -69.342,2.54 v2(-59.944,2.54)
PB15: P15.8 P20.2 | length 106.5
  Top Layer w0.254: P20.2 -75.565,-47.319 -74.434,-46.188 -74.434,-43.954 -71.12,-40.64 v2(-70.866,-40.64) ; v2(-59.318,1.642) -59.182,1.778 -55.626,1.778 -54.883,2.521 -34.017,2.521 -33.782,2.286 -33.528,2.286 v2(-33.528,2.032)
  Bottom Layer w0.254: v2(-70.866,-40.64) -69.577,-39.351 -69.577,-38.539 -69.723,-38.392 -69.723,0.889 -68.97,1.642 v2(-59.318,1.642) ; v2(-33.528,2.032) -18.288,2.032 -17.78,1.524 P15.8
PC14: P16.34 P20.4 | length 108.8
  Top Layer w0.254: v2(-15.24,-52.578) -15.24,-55.118 -14.732,-55.626 10.16,-55.626 12.192,-53.594 12.192,-49.276 14.732,-46.736 14.732,-41.91 13.716,-40.894 10.414,-40.894 P16.34
  Bottom Layer w0.254: P20.4 -70.485,-52.451 -69.85,-53.086 -15.748,-53.086 v2(-15.24,-52.578)
VCC-5: C2.1 C5.1 L1.2 P6.1 P6.2 P6.3 P6.4 P8.1 P8.2 P8.3 P8.4 P14.4 P16.1 P16.2 R6.2 U3.4 | length 269.1
  Top Layer w0.254: C2.1 -101.092,-33.528 C5.1 ; L1.2 -93.351,-24.505 -91.821,-26.035 R6.2
  Top Layer w0.762: P8.4 -67.691,-36.195 -65.532,-38.354 -65.532,-49.784 -61.722,-53.594 -49.276,-53.594 -48.26,-52.578 P14.4 -46.228,-50.292 -46.228,-51.816 -44.45,-53.594 -19.05,-53.594 -16.637,-51.181 8.509,-51.181 12.954,-46.736 v2(12.954,-42.926)
  Top Layer w1.27: C2.1 -98.425,-28.448 L1.2 -98.425,-20.701 -97.204,-19.48 U3.4
  Top Layer w2.032: C2.1 -105.029,-31.115 -106.68,-32.766 -106.68,-37.592 ; P6.4 P6.3 P6.2 P6.1 -106.299,-46.355 -106.68,-45.974 -106.68,-37.592 ; P8.4 P8.3 P8.2 P8.1 -94.361,-36.195 -95.758,-37.592 -106.68,-37.592
  Bottom Layer w0.762: P16.1 P16.2 11.43,0 11.938,-0.508 11.938,-10.476 12.954,-11.492 v2(12.954,-42.926)
VCC-12: C1.1 P5.2 U1.7 U2.7 U3.1 U4.7 U5.7 U6.7 U7.7 U8.7 U9.7 | length 77.6
  Top Layer w2.54: C1.1 -91.186,-7.112 -87.63,-7.112 ; -87.63,-13.716 -87.63,-7.112 ; -40.318,-24.13 -63.754,-24.13 -69.088,-18.796 -69.088,-11.176 -71.12,-9.144 -79.502,-9.144 -81.28,-7.366 P5.2 -86.233,-5.715 -87.63,-7.112
pads on no net: P10.6 P11.4 P11.5 P11.8 P12.5 P12.6 P12.7 P12.8 P13.4 P13.5 P13.6 P13.7 P14.1 P14.5 P14.6 P15.4 P15.5 P15.6 P16.3 P16.4 P16.6 P16.8 P16.10 P16.11 P16.12 P16.13 P16.14 P16.15 P16.16 P16.17 P16.18 P16.20 P16.21 P16.22 P16.23 P16.24 P16.25 P16.26 P16.28 P16.30

## Polygon pours and split planes (outlines as drawn)
GND on Top Layer "GND" (solid, remove dead copper, pour order 20): -110.109,7.62 10.414,7.62 10.668,7.62 12.7,5.588 12.7,-9.906 12.7,-10.16 14.986,-12.446 15.24,-12.7 15.24,-46.736 15.24,-46.99 12.7,-49.53 12.7,-50.292 12.7,-51.054 12.7,-52.832 12.7,-56.134 -110.109,-56.134
VCC-12 on Top Layer "VCC-12" (solid, remove dead copper, pour order 18): -36.83,-3.302 -36.83,-2.286 -43.18,-2.286 -43.18,-38.1 -36.83,-38.1 -36.83,-25.4 -29.464,-25.4 -21.844,-25.4 -21.844,-46.228 -17.78,-46.228 -16.764,-46.228 -16.256,-46.228 -16.51,-45.974 -16.51,-9.906 -22.098,-9.906 -22.098,-22.606 -29.464,-22.606 -36.83,-22.606
GND on Bottom Layer "GND" (solid, remove dead copper, pour order 24): -110.109,-55.626 -109.855,-55.88 12.7,-55.88 12.7,-49.53 15.24,-46.99 15.24,-12.7 12.7,-10.16 12.7,5.334 10.668,7.366 10.668,7.62 -110.109,7.62

## Keep-outs
Keep-Out Layer:
  the board outline again, w0.254

## Other copper
Top Layer:
  region net MOTOR2-: -44.45,-10.998 -44.45,-2.362 -56.642,-2.362 -58.928,-4.648 -58.928,-10.744 -58.674,-10.998
  region net MOTOR1-: -44.45,-34.62 -44.45,-25.984 -56.642,-25.984 -58.928,-28.27 -58.928,-33.647 -54.864,-33.647 -53.086,-34.62
  region net MOTOR3+: -14.224,-25.984 -14.224,-34.62 -4.318,-34.62 0.635,-33.35 0.635,-29.667 0.635,-27.762 0.635,-25.984
  region net MOTOR4+: -14.224,-2.362 -14.224,-10.998 -4.826,-10.998 -0.762,-10.236 0.762,-9.95 0.762,-5.41 0.762,-3.886 0.762,-2.362 -0.762,-2.362
  region net MOTOR2+: -44.45,-22.428 -44.45,-13.792 -53.086,-13.792 -54.61,-12.268 -56.515,-12.268 -57.912,-12.268 -59.182,-13.03 -59.182,-18.11 -57.404,-19.888 -53.086,-19.888 -53.086,-22.428
  region net MOTOR1+: -44.45,-46.05 -44.45,-37.414 -53.086,-37.414 -55.118,-35.382 -57.912,-35.382 -59.182,-36.652 -59.182,-41.732 -58.293,-42.621 -53.086,-42.748 -53.086,-46.05
  region net MOTOR3-: -14.224,-45.796 -14.224,-37.16 -4.572,-37.16 -2.794,-35.128 0.762,-35.128 0.762,-36.144 0.762,-40.716 -0.381,-42.367 -5.588,-42.494 -5.588,-45.796
  region net MOTOR4-: -14.478,-22.428 -14.478,-13.792 -5.842,-13.792 -4.318,-13.03 -3.429,-12.141 -1.524,-12.141 0.762,-12.141 0.762,-13.792 0.762,-16.078 0.254,-18.11 -0.635,-18.999 -5.842,-19.126 -5.842,-22.428
Bottom Layer:
  rectangle net GND: -82.55,-24.13 -72.39,-11.43

## Silkscreen, mask and mechanical layers (free items; w line width, h text height)
Top Overlay:
  lines w0.254: -102.87,-43.815 -97.917,-43.815 ; -102.743,-46.355 -97.79,-46.355 -90.17,-46.355 ; -97.79,-43.688 -90.297,-43.688 ; -87.757,-36.195 -73.025,-36.195 ; -87.63,-38.735 -73.025,-38.735 ; -84.328,-52.832 -71.628,-52.832 ; -81.788,-55.372 -81.788,-50.292 ; -80.645,-33.655 -80.645,-31.115 ; -79.248,-55.372 -79.248,-50.292 ; -78.105,-33.655 -78.105,-31.115 ; -76.708,-55.372 -76.708,-50.546 ; -75.565,-33.655 -75.565,-31.115 ; -74.168,-55.372 -74.168,-50.292 ; -73.025,-33.655 -73.025,-31.115 -73.025,-31.877 ; -71.628,-55.372 -71.628,-52.832 ; -68.834,-55.372 -68.834,-52.832 ; -32.029,-19.355 -30.404,-20.98 -30.404,-23.216 ; -32.029,-17.272 -30.556,-15.799 -30.556,-14.275 ; -31.979,-5.791 -30.353,-4.166 -30.353,-3.023 ; -31.928,-7.595 -30.658,-8.865 -30.658,-10.693 ; -71.628,-52.832 -66.294,-52.832 -66.294,-55.118 -66.548,-55.372 -84.328,-55.372 -84.328,-50.292 -81.153,-50.292 -74.803,-50.292 -71.628,-50.292 -71.628,-52.832
  text "+" at -82.296,-0.254 h2.54
  text "-" at -76.962,-0.254 h2.54
  text "BAT" at -89.916,-2.286 h1.52
  text "M2" at -63.5,-5.334 h2.54
  text "M4" at 0.254,-5.588 h2.54
  text "-" at -64.77,-9.652 h2.54
  text "+" at 4.318,-9.652 h2.54
  text "-" at 4.572,-15.24 h2.54
  text "+" at -64.77,-15.748 h2.54
  text "M1" at -62.738,-28.448 h2.54
  text "M3" at 0,-28.956 h2.54
  text "1" at -80.772,-29.464 h0.76
  text "2" at -78.232,-29.464 h0.76
  text "3" at -75.692,-29.464 h0.76
  text "4" at -73.406,-29.464 h0.76
  text "+" at 4.318,-33.02 h2.54
  text "-" at -65.024,-33.274 h2.54
  text "signal" at -86.106,-34.036 h0.76
  text "VCC-5v" at -86.868,-35.814 h0.76
  text "-" at 4.572,-37.846 h2.54
  text "+" at -65.024,-38.1 h2.54
  text "GND" at -87.122,-38.608 h0.76
  text "SERVO PORT" at -83.82,-41.91 h1.52
  text "GND" at -101.854,-43.434 h0.76
  text "SWDIO" at -84.582,-44.196 h0.51
  text "SWCLK" at -81.788,-44.196 h0.51
  text "VCC-5v" at -103.886,-45.974 h0.76
  text "1" at -103.378,-51.816 h1.27
  text "2" at -100.584,-51.816 h1.27
  text "3" at -98.298,-51.816 h1.27
  text "4" at -95.758,-51.816 h1.27
  text "5" at -93.218,-51.816 h1.27
  text "6" at -90.424,-51.816 h1.27
  text "A13" at -84.074,-51.816 h0.76
  text "A14" at -81.534,-51.816 h0.76
  text "B3" at -78.74,-51.816 h0.76
  text "B5" at -75.946,-51.816 h0.76
  text "B4" at -73.66,-51.816 h0.76
  text "C0" at -83.82,-54.61 h0.76
  text "C1" at -81.026,-54.61 h0.76
  text "B14" at -78.994,-54.61 h0.76
  text "B15" at -76.454,-54.61 h0.76
  text "C13" at -73.914,-54.61 h0.76
  text "C14" at -71.374,-54.61 h0.76
  text "C15" at -68.58,-54.61 h0.76
  text "receiver" at -105.41,-54.864 h2.54
  text "ADC/SPI/GPIO/SWD" at -65.024,-55.118 h1.78
  text "5" at -87.884,-58.674 h1.27